# EAGLE board main (EAGLE 7.4.0)
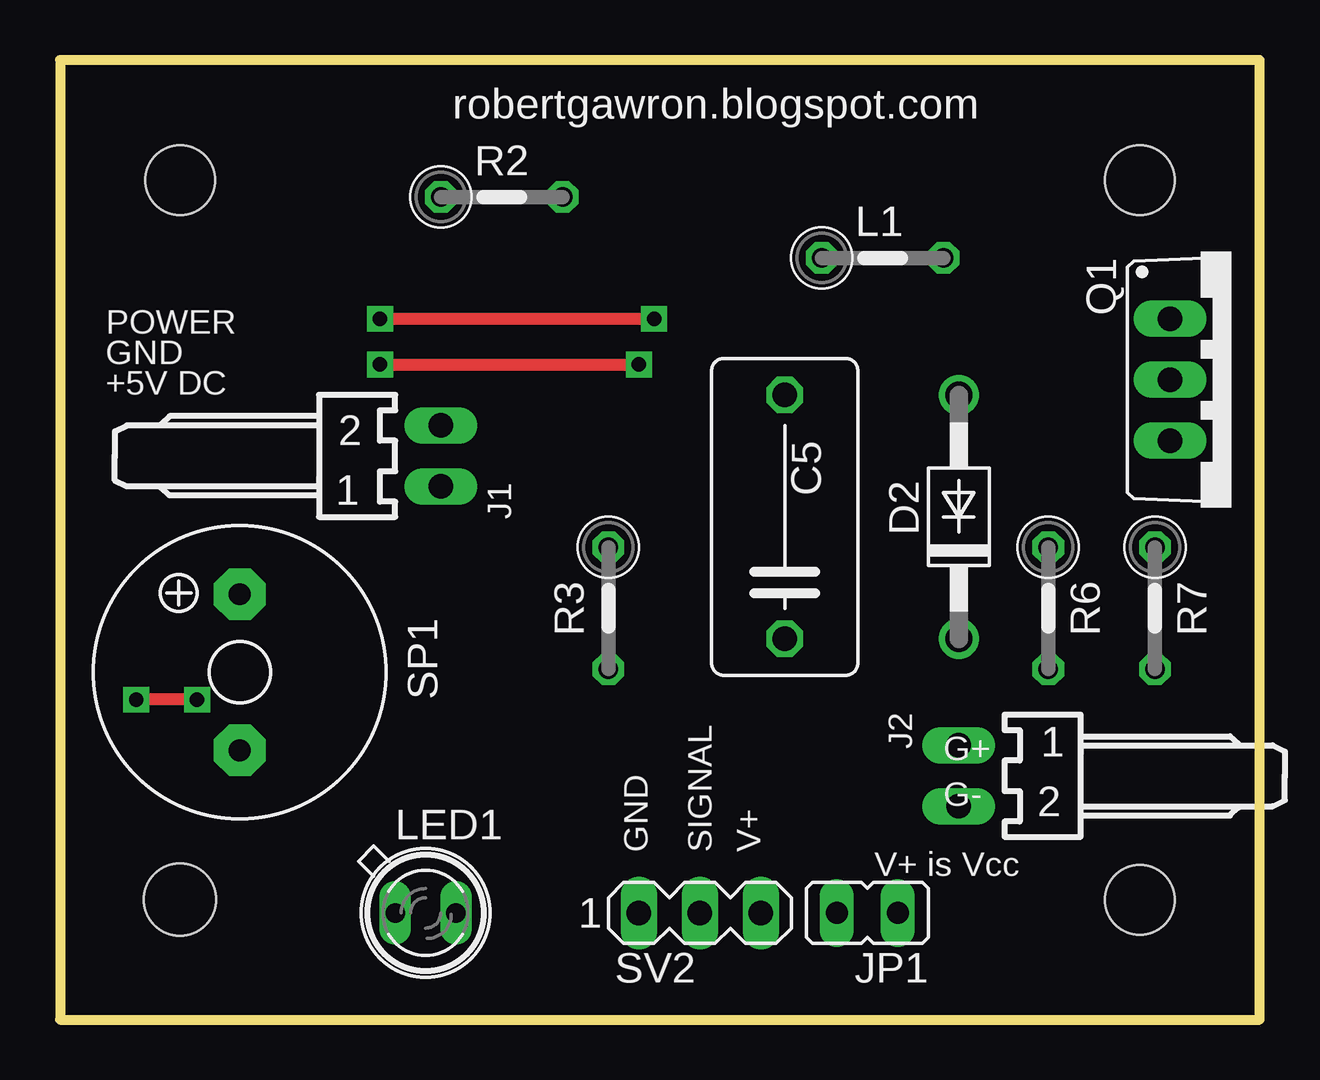
[diagram p0: board, top side]
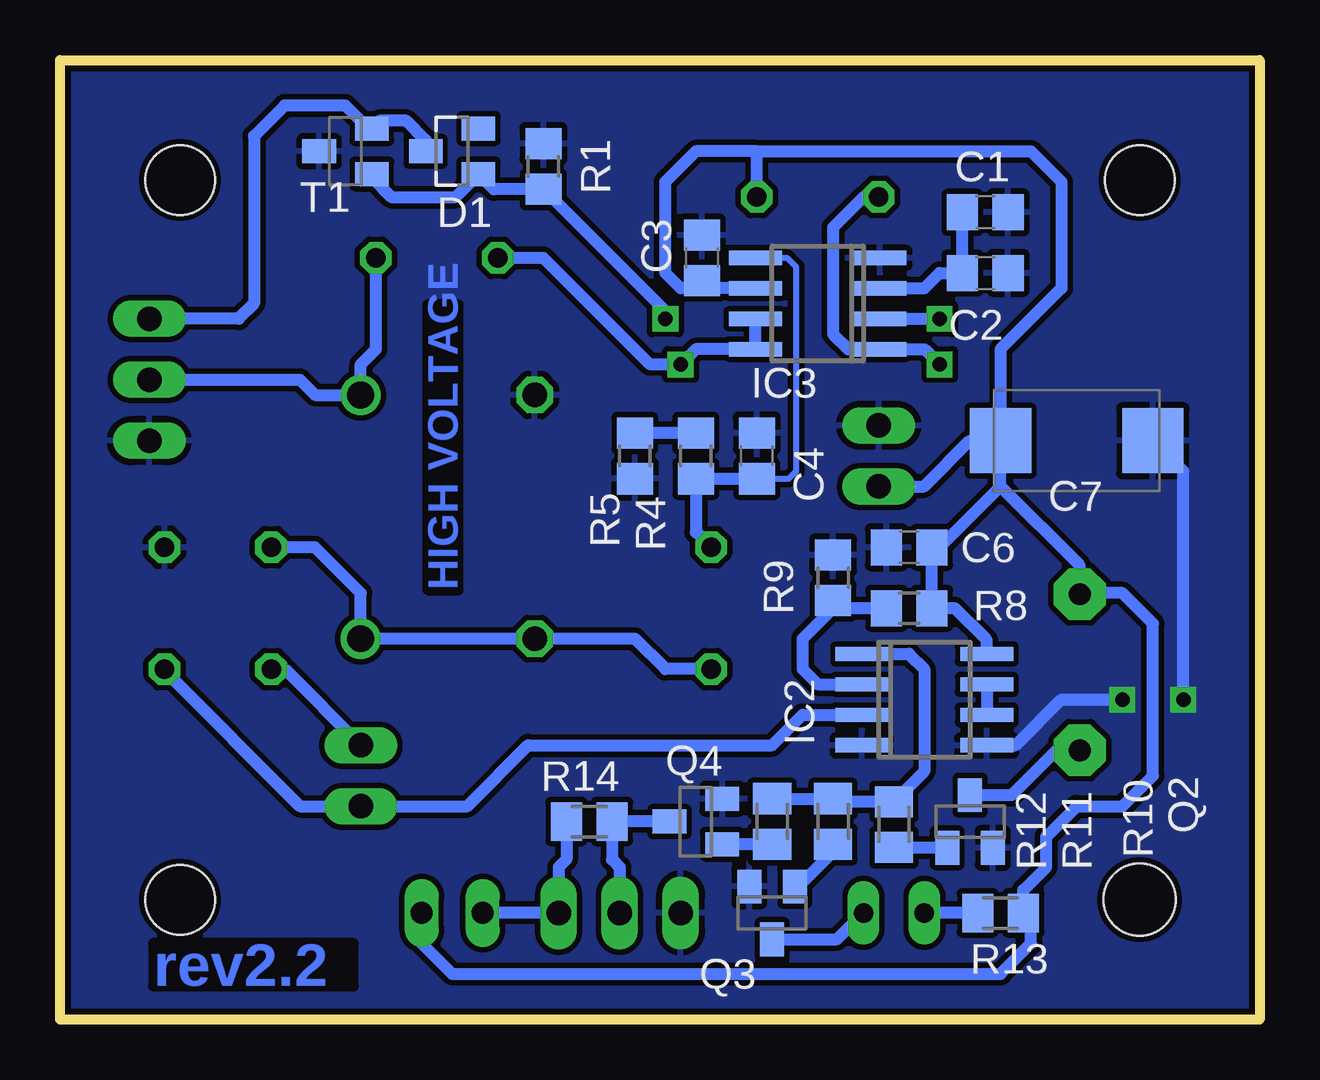
[diagram p1: board, bottom side, seen from below]

Size 50 x 40 mm. Coordinates in mm from the lower left corner, seen from the top.
Outline: 0,40 0,0 50,0 50,40 0,40
Copper layers (1*16): Top 0.035mm / dielectric 1.5mm / Bottom 0.035mm
Design rules "default *": minimum track width 10mil, minimum drill 24mil, track to track 9mil, track to pad 9mil, pad to pad 8mil, via to via 8mil, smd to smd 8mil, copper to edge 10mil, drill to drill 8mil, minimum pad ring 10mil, minimum via ring 8mil, stop-mask expansion 4mil, vias tented up to drill 0mil, thermal gap 10mil
Net classes: 1 hv: clearance 0.584 mm
Holes 3 mm at 5,5
Holes 2.9 mm at 5,35 45,35 45,5

## Footprints (pad centres in the part's own frame; a part is rotated, then mirrored left to right if it is on the bottom)
C0805 = smd 1.3 x 1.5: 1 -0.95,0; 2 0.95,0
C102-064X133 = drill 1.016 octagon: 1 -5.08,0; 2 5.08,0
D/7343-31R = smd 2.55 x 2.7: + 3.175,0; - -3.175,0
SOT23 = smd 1 x 1.4: 1 -0.95,-1.1; 2 0.95,-1.1; 3 0,1.1
DO41-10 = drill 1.118: A 5.08,0; C -5.08,0
SO08 = smd 0.6 x 2.2: 1 -1.905,-2.6; 2 -0.635,-2.6; 3 0.635,-2.6; 4 1.905,-2.6; 5 1.905,2.6; 6 0.635,2.6; 7 -0.635,2.6; 8 -1.905,2.6
SOIC8 = smd 0.6 x 2.2: 1 -1.905,-2.6; 2 -0.635,-2.6; 3 0.635,-2.6; 4 1.905,-2.6; 5 1.905,2.6; 6 0.635,2.6; 7 -0.635,2.6; 8 -1.905,2.6
7395-02 = drill 1.016 long: 1 1.27,0; 2 -1.27,0
JP1 = drill 0.914 long: 1 0,-1.27; 2 0,1.27
0207/5V = drill 0.813 octagon: 1 -2.54,0; 2 2.54,0
SFH482 = drill 0.813 long: A -1.27,0; K 1.27,0
TO220BV = drill 1.016 long: D 0,-2.54; G -2.54,-2.54; S 2.54,-2.54
R0805 = smd 1.3 x 1.5: 1 -0.95,0; 2 0.95,0
M0805 = smd 1.3 x 1.6: 1 -0.95,0; 2 0.95,0
KSS1201 = drill 0.914 pad 2.159 octagon: + 3.251,0; - -3.251,0
MA03-1 = drill 1.016 long: 1 -2.54,0; 2 0,0; 3 2.54,0
SOT23-BEC = smd 1 x 1.4: B -0.95,-1.1; C 0,1.1; E 0.95,-1.1

## Placement (x,y rotation side)
C1  32n  [C0805]  11.43,33.66 0 bottom
C2  32n  [C0805]  11.43,31.11 0 bottom
C3  100n  [C0805]  23.24,31.75 90 bottom
C4  10n  [C0805]  20.95,23.5 90 bottom
C5  100n/630V  [C102-064X133]  30.21,20.95 90 top
C6  100n  [C0805]  14.61,19.68 180 bottom
C7  330u  [D/7343-31R]  7.62,24.13 180 bottom
D1  BAS40  [SOT23]  33.66,36.2 90 bottom
D2  1n4007  [DO41-10]  37.47,20.95 90 top
IC2  LM358D  [SO08]  13.97,13.34 270 bottom
IC3  MC34063AD  [SOIC8]  18.41,29.84 90 bottom
J1  22-05-7028-02  [7395-02]  15.88,23.5 270 top
J2  22-05-7028-02  [7395-02]  37.47,10.16 90 top
JP1  [JP1]  33.66,4.45 90 top
L1  680m  [0207/5V]  34.29,31.75 0 top
LED1  [SFH482]  15.24,4.45 0 top
Q1  IRF840  [TO220BV]  48.81,26.67 270 top
Q2  [SOT23]  12.06,8.26 0 bottom
Q3  [SOT23]  20.32,4.45 180 bottom
Q4  [SOT23]  23.5,8.26 90 bottom
R1  10k  [R0805]  29.84,35.56 270 bottom
R2  R22/0.5W  [0207/5V]  18.41,34.29 0 top
R3  10M  [0207/5V]  22.86,17.14 270 top
R4  30k+1k  [R0805]  23.5,23.5 270 bottom
R5  30k+1k  [R0805]  26.04,23.5 90 bottom
R6  6M8  [0207/5V]  41.2,17.14 270 top
R7  10k  [0207/5V]  45.64,17.14 270 top
R8  [R0805]  14.61,17.14 0 bottom
R9  470R  [R0805]  17.78,18.41 270 bottom
R10  1k  [M0805]  15.24,8.13 270 bottom
R11  1k  [M0805]  17.78,8.26 270 bottom
R12  1k  [M0805]  20.32,8.26 270 bottom
R13  510R  [M0805]  10.79,4.45 0 bottom
R14  [M0805]  27.94,8.26 180 bottom
SP1  8R  [KSS1201]  7.49,14.48 90 top
SV2  [MA03-1]  26.67,4.45 0 top
T1  [SOT23-BEC]  38.1,36.2 90 bottom

## Library data of the parts
C1-C6 L1 R1-R14 = resistor
C7 = rcl
D1 D2 = diode
IC2 = linear
IC3 = mc34063
J1 J2 = con-molex; OC_FARNELL: 9731601; OC_NEWARK: unknown
JP1 = jumper
LED1 = led
Q1 = transistor-power
Q2-Q4 = transistor-npn
SP1 = buzzer; OC_FARNELL: unknown; OC_NEWARK: unknown
SV2 = con-lstb; OC_FARNELL: unknown; OC_NEWARK: unknown
T1 = transistor

## Nets
N$1: Q4.1 R12.2
N$2: Q3.1 R11.2
N$3: LED1.K Q3.3
N$4: Q4.3 R14.1 SV2.2
N$5: C1.1 C2.1 IC3.3
N$6: LED1.A R13.1
N$7: IC3.1 IC3.7 IC3.8 L1.1 R2.1
N$8: IC2.1 R10.1 R11.1 R12.1
N$9: Q2.3 SP1.-
N$10: Q2.1 R10.2
N$11: R4.1 R5.2
N$12 [hv]: C5.1 D2.C R3.2 R6.1
N$13: C4.1 IC3.5 R3.1 R4.2
N$14: D1.1 IC3.2 R1.2 T1.B
N$15 [hv]: D2.A L1.2 Q1.D
N$16: D1.3 Q1.G T1.E
N$17: IC2.3 J2.2 R7.2
N$18: J2.1 R6.2
N$19: IC2.2 R8.1 R9.2
N$21: JP1.2 R14.2 SV2.3
N$22: IC2.6 IC2.7
V+: C3.1 C6.1 C7.+ IC2.8 IC3.6 J1.1 JP1.1 R2.2 R8.2 R13.2 SP1.+
V-: C1.2 C2.2 C3.2 C4.2 C5.2 C6.2 C7.- IC2.4 IC2.5 IC3.4 J1.2 Q1.S Q2.2 Q3.2 Q4.2 R1.1 R5.1 R7.1 R9.1 SV2.1 T1.C

## Tracks (layer width: path | path; a pad name or v marks a point on that pad's centre or on a via)
N$1
  Bottom 0.508: R12.2 Q4.1
N$2
  Bottom 0.508: Q3.1 19.22,5.54 17.78,6.99 R11.2
N$3
  Bottom 0.508: Q3.3 17.61,3.35 LED1.K
N$4
  Bottom 0.508: SV2.2 26.67,6.35 26.99,6.67 R14.1 Q4.3
N$5
  Bottom 0.508: IC3.3 13.97,30.48 13.34,31.11 C2.1 C1.1
N$6
  Bottom 0.508: R13.1 LED1.A
N$7  (via drill 0.6)
  Top 0.508: v13.34,27.3 v24.13,27.3
  Bottom 0.508: IC3.7 IC3.8 23.5,27.94 v24.13,27.3 25.4,27.3 29.84,31.75 L1.1 | R2.1 16.51,34.29 17.78,33.02 17.78,28.57 17.14,27.94 IC3.1 13.97,27.94 v13.34,27.3
N$8
  Bottom 0.508: R12.1 R11.1 17.65,9.08 R10.1 13.97,10.35 13.97,14.61 14.61,15.24 IC2.1
N$9
  Bottom 0.508: Q2.3 10.33,9.36 8.26,11.43 7.7,11.43 SP1.-
N$10
  Bottom 0.508: R10.2 13.04,7.18 Q2.1
N$11
  Bottom 0.508: R4.1 R5.2
N$12
  Bottom 0.508: R3.2 24.77,14.61 26.04,15.88 C5.1 D2.C 37.47,17.78 39.37,19.68 R6.1
N$13
  Bottom 0.254: C4.1 19.62,22.55 19.3,22.86 19.3,31.37 19.68,31.75 IC3.5
  Bottom 0.508: C4.1 R4.2 23.5,20.32 R3.1
N$14  (via drill 0.6)
  Top 0.508: v13.34,29.21 v24.77,29.21
  Bottom 0.508: R1.2 31.92,34.61 D1.1 33.51,34.29 36.2,34.29 37,35.09 T1.B | IC3.2 v13.34,29.21 | 29.52,34.29 R1.2 | v24.77,29.21 24.77,29.53 R1.2
N$15
  Bottom 0.508: Q1.D 40.01,26.67 39.37,26.04 D2.A 37.47,27.3 36.83,27.94 L1.2
N$16
  Bottom 0.508: D1.3 34.76,36.66 35.56,37.47 36.68,37.47 T1.E 37.15,37.15 38.1,38.1 40.64,38.1 41.91,36.83 41.91,29.84 42.55,29.21 Q1.G
N$17
  Bottom 0.508: R7.2 45.64,14.53 40.01,8.89 J2.2 33.02,8.89 30.48,11.43 20.32,11.43 19.05,12.7 IC2.3
N$18
  Bottom 0.508: 41.27,14.61 R6.2 40.64,14.61 J2.1
N$19
  Bottom 0.508: R8.1 17.46,17.14 | 17.46,17.14 R9.2 | 17.46,17.14 17.78,17.14 19.05,15.88 19.05,14.61 18.41,13.97 IC2.2
N$21
  Bottom 0.508: JP1.2 SV2.3 29.21,6.35 28.89,6.67 R14.2
N$22
  Bottom 0.508: IC2.7 IC2.6
V+
  Bottom 0.508: IC2.8 11.37,15.81 12.7,17.14 R8.2 C6.1 13.34,19.68 10.79,22.23 | JP1.1 34.92,3.17 33.66,1.91 10.79,1.91 9.53,3.17 9.53,4.12 R13.2 9.85,5.39 8.89,6.35 8.89,7.62 7.62,8.89 5.71,8.89 4.45,10.16 4.45,16.51 5.71,17.78 7.44,17.78 SP1.+ 7.49,18.92 10.79,22.23 | C3.1 22.92,30.48 IC3.6 24.13,30.48 24.77,31.11 24.77,34.92 23.5,36.2 20.95,36.2 | 10.79,22.23 C7.+ | R2.2 20.95,36.2 | 20.95,36.2 9.53,36.2 8.26,34.92 8.26,30.48 10.79,27.94 C7.+ | J1.1 13.97,22.23 12.06,24.13 C7.+
V-  (via drill 0.6)
  Top 0.508: v5.71,13.34 v3.17,13.34
  Bottom 0.508: IC2.5 10.16,11.43 8.26,13.34 v5.71,13.34 | v3.17,13.34 3.17,22.86 C7.-
  pour Bottom: 0,0 0,40 50,40 50,0

## Text on the board
Bottom: HIGH VOLTAGE | rev2.2
tNames: robertgawron.blogspot.com | POWER | GND | +5V DC | G+ | G- | GND | SIGNAL | V+ | V+ is Vcc